# Altium PCB 喂鸟.PcbDoc
Units mm, origin at the board's own origin, x right, y up, seen from the top; angles counter-clockwise.
Board outline 81.37 x 53.34 mm, 2 copper layers (Top Layer, Bottom Layer); 12 components, 27 nets, 125 pads, 4 vias.
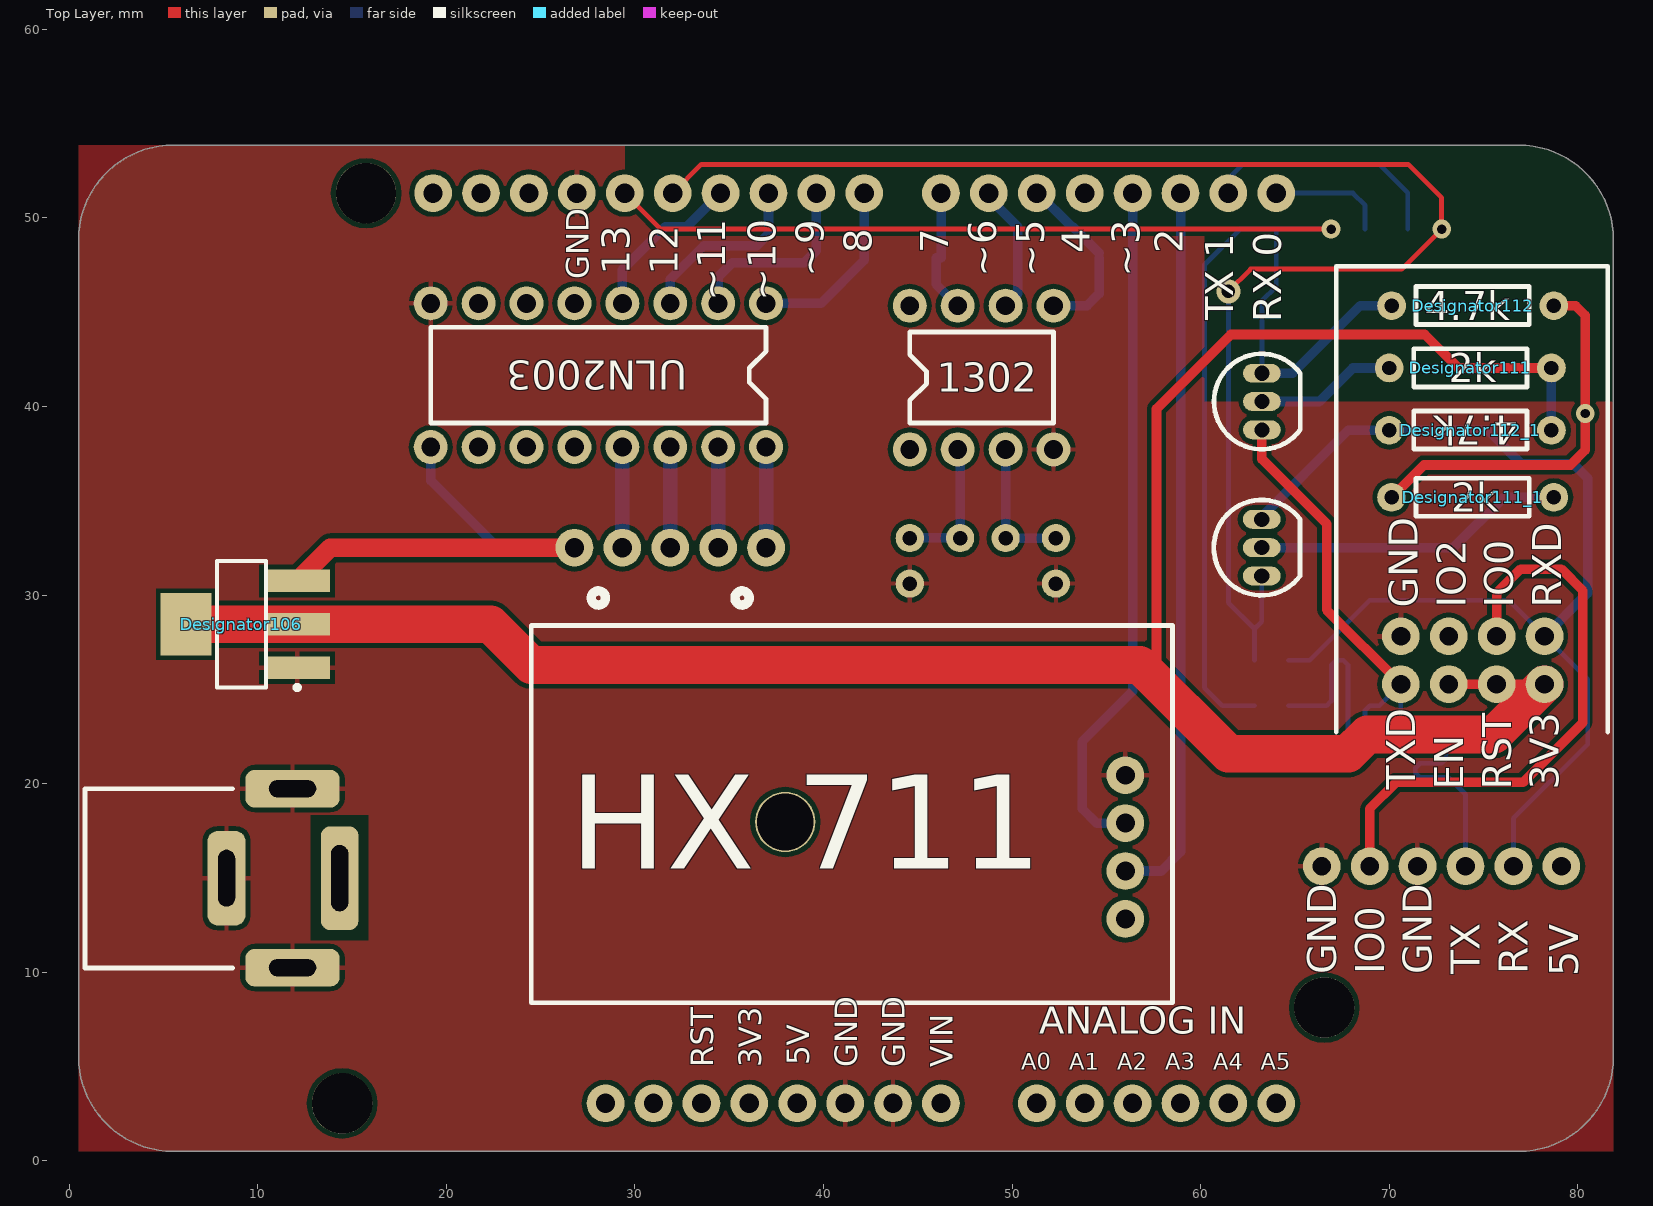
[diagram p0: Top Layer view]
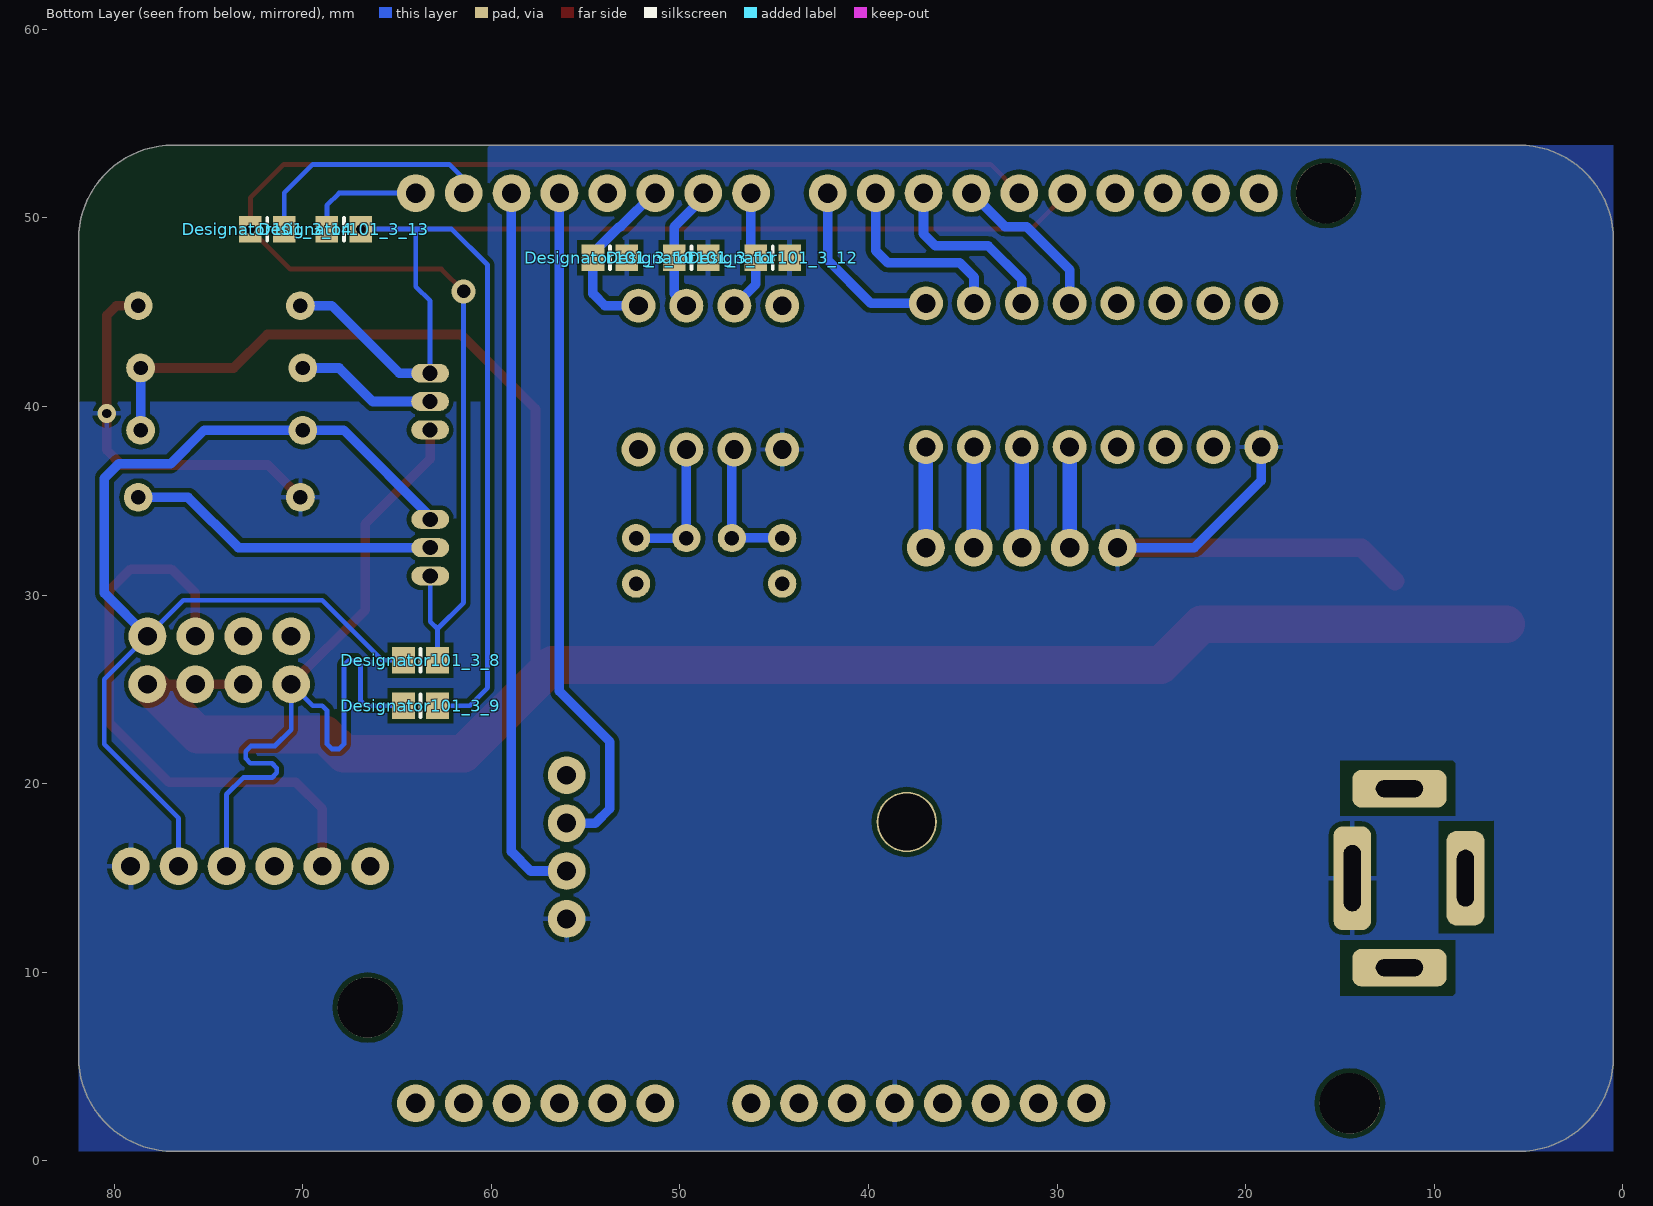
[diagram p1: Bottom Layer view, seen from below]

## Layer stack, top to bottom
Top Solder: solder mask 0.0102, Solder Resist, Dk 3.5
Top Layer: signal copper 0.0356
Dielectric 1: dielectric 0.32, FR-4, Dk 4.8
Bottom Layer: signal copper 0.0356
Bottom Solder: solder mask 0.0102, Solder Resist, Dk 3.5

## Board outline
0.508,5.508 0.508,48.848 cw(c5.508,48.848) 5.508,53.848 76.882,53.848 cw(c76.882,48.848) 81.882,48.848 81.882,5.508 cw(c76.882,5.508) 76.882,0.508 5.508,0.508 cw(c5.508,5.508)

## Design rules (kind name [scope] priority, off if disabled: settings)
Clearance [All] p1: gap=0.254 ignorepadtopadclearanceinfootprint=FALSE except(0: Arc-Hole Track-Hole SMDPad-Hole THPad-Hole Via-Hole Fill-Hole Poly-Hole Region-Hole Text-Hole)
PolygonConnect [All] p1: connectstyle=Relief reliefconductorwidth=0.254 reliefentries=4 polygonreliefangle="90 Angle" airgapwidth=0.254
RoutingVias [All] p1: holewidth=0.711 width=1.27 viastyle="Through Hole" minholewidth=0.711 minwidth=1.27 maxholewidth=0.711 maxwidth=1.27
SolderMaskExpansion [All] p1: expansion=0.102
Width [All] p1: maxlimit=5 minlimit=0.254 preferedwidth=0.508 minimp=50.000000 maximp=50.000000 favimp=50.000000
30 further rules are at their usual default settings.

## Components (designator, comment, footprint, x,y, rotation, side; value= is the part's Value field where it differs from the comment)
Designator101_3_8 "Comment" 6-0805_N 63.754,26.543 r180 bottom
Designator101_3_9 "Comment" 6-0805_N 63.754,24.13 r180 bottom
Designator101_3_10 "Comment" 6-0805_N 53.71,47.879 r0 bottom
Designator101_3_11 "Comment" 6-0805_N 49.392,47.879 r0 bottom
Designator101_3_12 "Comment" 6-0805_N 45.074,47.879 r0 bottom
Designator101_3_13 "Comment" 6-0805_N 67.818,49.403 r0 bottom
Designator101_3_14 "Comment" 6-0805_N 71.882,49.403 r0 bottom
Designator106 "Comment" SOT223_M 9.144,28.448 r180 top
Designator111 "Comment" R 74.295,42.037 r180 top
Designator111_1 "Comment" R 74.422,35.179 r180 top
Designator112 "Comment" R 74.422,45.339 r180 top
Designator112_1 "Comment" R 74.295,38.735 r180 top

## Footprints (in the part's own frame and the unit in brackets; to place one, negate y for a bottom-side part, rotate by r counter-clockwise, add the part's x,y. Pads: shape width x height; smd on the part's side, far side on the other; paste and mask are expansions set on the pad)
6-0805_N [mm] "Chip Resistor, Body 2.0x1.2mm, IPC Medium Density"
  rect 1.2x1.4 smd: 1(-0.9,0) 2(0.9,0)
  silkscreen extent 0,-0.6 0,0.6, body extent -1.07,-0.7 1.07,0.7, height 0.7
R [mil]
  round 60 hole 30: 1(-169.29,0) 2(169.29,0)
  silkscreen extent -118,-40 118,39
SOT223_M [mm] "SOT223, 4-Leads, Body 6.5x3.5mm, Pitch 2.3mm, Lead Span 7mm, IPC Low Density"
  rect 3.5x1.2 smd: 1(-2.95,2.3) 2(-2.95,0) 3(-2.95,-2.3)
  rect 2.7x3.3 smd: 4(2.95,0)
  silkscreen extent -3.08,-3.35 1.3,3.47, body extent -1.85,-3.35 1.85,3.35, height 1.7

## Free pads (board coordinates)
  round 2 hole 1.02: 0(64.008,51.308) 1(36.957,32.512) 1(51.308,3.048) 1(61.468,51.308) 2(34.417,32.512) 2(53.848,3.048) 2(58.928,51.308) 3(31.877,32.512) 3(56.388,3.048) 3(56.388,51.308) 4(29.337,32.512) 4(53.848,51.308) 4(58.928,3.048) 5(26.797,32.512) 5(51.308,51.308) 5(61.468,3.048) 6(48.768,51.308) 7(46.228,51.308) 8(42.164,51.308) 9(39.624,51.308) 10(37.084,51.308) 11(34.544,51.308) 12(32.004,51.308) 13(28.448,3.048) 13(29.464,51.308) 13(30.988,3.048) 13(33.528,3.048) 13(36.068,3.048) 13(38.608,3.048) 13(41.148,3.048) 13(43.688,3.048) 13(46.228,3.048) 13(64.008,3.048) 14(26.924,51.308) 15(24.384,51.308) 16(21.844,51.308) 17(19.304,51.308)
  rrect50% 2x5.5 hole 3.5 slot 0.9 at 0 deg: 1(14.351,14.986)
  round 3.2 hole 3.2 unplated: 1(14.478,3.048) 1(15.748,51.308) 1(66.548,8.128)
  round 1.8 hole 1: 1(36.957,45.466) 1(44.577,37.719) 2(34.417,45.466) 2(47.117,37.719) 3(31.877,45.466) 3(49.657,37.719) 4(29.337,45.466) 4(52.197,37.719) 5(26.797,45.466) 5(52.197,45.339) 6(24.257,45.466) 6(49.657,45.339) 7(21.717,45.466) 7(47.117,45.339) 8(19.177,45.466) 8(44.577,45.339) 9(19.177,37.846) 10(21.717,37.846) 11(24.257,37.846) 12(26.797,37.846) 13(29.337,37.846) 14(31.877,37.846) 15(34.417,37.846) 16(36.957,37.846)
  round 3.2 hole 3 unplated: 1(37.973,17.968)
  round 1.5 hole 0.762: 1(44.577,33.02) 1(47.244,33.02) 1(52.324,30.607) 2(44.577,30.607) 2(49.657,33.02) 2(52.324,33.02)
  round 2 hole 1: 1(56.007,20.447) 1(66.421,15.621) 1(78.232,27.813) 2(56.007,17.907) 2(68.961,15.621) 2(75.692,27.813) 3(56.007,15.367) 3(71.501,15.621) 3(73.152,27.813) 4(56.007,12.827) 4(70.612,27.813) 4(74.041,15.621) 5(70.612,25.273) 5(76.581,15.621) 6(73.152,25.273) 6(79.121,15.621) 7(75.692,25.273) 8(78.232,25.273)
  oval 2x1 hole 0.8: 1(63.238,32.512) 1(63.246,40.259) 2(63.238,34.012) 2(63.246,41.759) 3(63.238,31.012) 3(63.246,38.759)
  rrect50% 5x2 hole 0.9 slot 2.5 at 0 deg: 2(11.851,19.731) 3(11.851,10.241)
  rrect50% 2x5 hole 3 slot 0.9 at 0 deg: 4(8.351,14.986)

## Via types
v1: diameter 1, hole 0.5, Top Layer to Bottom Layer, 2 vias
v2: diameter 1, hole 0.5, Top Layer to Bottom Layer, tented both sides, 1 vias
v3: diameter 1.27, hole 0.711, Top Layer to Bottom Layer, tented both sides, 1 vias

## Nets (pads, with @x,y where several pads share a name; then routed paths per layer and width w, separated by ;. In a path a pad name is that pad's centre, name@x,y a point inside that pad or via, vN(x,y) a via of type N, cw(c..) or ccw(c..) an arc to the next point about the centre after c; other vN are vias at no path point)
3V3: Designator106.2 Designator106.4 Designator111.1 Designator112_1.1 pad.6@73.152,25.273 pad.7@75.692,25.273 pad.8@78.232,25.273 | length 122.3
  Top Layer w0.508: 57.658,25.654 57.658,39.87 61.603,43.815 71.882,43.815 73.66,42.037 Designator111.1 ; pad.6@73.152,25.273 75.692,25.273 pad.8@78.232,25.273
  Top Layer w2: Designator106.4 Designator106.2 22.352,28.448 24.511,26.289 56.769,26.289 61.468,21.59 67.818,21.59 68.834,22.606 75.565,22.606 pad.8@78.232,25.273
  Bottom Layer w0.508: Designator112_1.1@78.595,38.743 Designator111.1
GND: Designator106.1 pad.1@52.324,30.607 pad.1@56.007,20.447 pad.1@66.421,15.621 pad.2@11.851,19.731 pad.2@44.577,30.607 pad.3@11.851,10.241 pad.3@71.501,15.621 pad.4@8.351,14.986 pad.4@52.197,37.719 pad.4@70.612,27.813 pad.8@19.177,45.466 pad.13@41.148,3.048 pad.13@43.688,3.048 pad.14@26.924,51.308
in1: pad.1@36.957,45.466 pad.8@42.164,51.308 | length 9.7
  Bottom Layer w0.508: pad.1@36.957,45.474 39.886,45.474 42.164,47.752 pad.8@42.164,51.308
in2: pad.2@34.417,45.466 pad.9@39.624,51.308 | length 10.2
  Bottom Layer w0.508: pad.2@34.409,45.466 34.409,46.855 35.179,47.625 38.989,47.625 39.624,48.26 pad.9@39.624,51.308
in3: pad.3@31.877,45.466 pad.10@37.084,51.308 | length 9.6
  Bottom Layer w0.508: pad.3@31.869,45.466 31.869,46.728 33.655,48.514 36.449,48.514 37.084,49.149 pad.10@37.084,51.308
in4: pad.4@29.337,45.466 pad.11@34.544,51.308 | length 8.7
  Bottom Layer w0.508: pad.4@29.329,45.466 29.329,47.236 31.623,49.53 32.766,49.53 pad.11@34.544,51.308
IO0: pad.2@68.961,15.621 pad.2@75.692,27.813 | length 31.1
  Top Layer w0.508: pad.2@68.961,15.621 68.961,18.669 70.358,20.066 77.089,20.066 80.264,23.241 80.264,30.226 79.121,31.369 76.962,31.369 75.692,30.099 pad.2@75.692,27.821
out1: pad.1@36.957,32.512 pad.16@36.957,37.846 | length 5.3
  Bottom Layer w0.762: pad.1@36.957,32.52 pad.16@36.957,37.846
out2: pad.2@34.417,32.512 pad.15@34.417,37.846 | length 5.3
  Bottom Layer w0.762: pad.2@34.417,32.512 pad.15@34.417,37.838
out3: pad.3@31.877,32.512 pad.14@31.877,37.846 | length 5.3
  Bottom Layer w0.762: pad.3@31.877,32.512 pad.14@31.877,37.838
out4: pad.4@29.337,32.512 pad.13@29.337,37.846 | length 5.3
  Bottom Layer w0.762: pad.4@29.337,32.512 pad.13@29.337,37.838
pin2: pad.2@58.928,51.308 pad.3@56.007,15.367 | length 38.3
  Bottom Layer w0.508: pad.3@56.007,15.367 57.912,15.367 58.936,16.391 pad.2@58.936,51.308
pin3: pad.2@56.007,17.907 pad.3@56.388,51.308 | length 36.3
  Bottom Layer w0.508: pad.2@56.007,17.907 54.483,17.907 53.721,18.669 53.721,22.225 56.396,24.9 pad.3@56.396,51.308
pin5: Designator101_3_10.2 pad.5@51.308,51.308 pad.5@52.197,45.339 | length 9.3
  Bottom Layer w0.508: pad.5@51.316,51.308 51.316,51.357 53.143,49.53 53.213,49.53 Designator101_3_10.2@54.61,48.133 ; pad.5@52.197,45.339 53.975,45.339 54.618,45.982 Designator101_3_10.2@54.618,47.879
pin6: Designator101_3_11.2 pad.6@48.768,51.308 pad.6@49.657,45.339 | length 6.9
  Bottom Layer w0.508: pad.6@48.776,51.308 48.776,51.046 50.292,49.53 Designator101_3_11.2 ; pad.6@49.657,45.339 50.3,45.982 Designator101_3_11.2@50.3,47.879
pin7: Designator101_3_12.2 pad.7@46.228,51.308 pad.7@47.117,45.339 | length 6.4
  Bottom Layer w0.508: Designator101_3_12.2@45.982,47.879 45.982,46.474 pad.7@47.117,45.339 ; Designator101_3_12.2@46.236,47.879 pad.7@46.236,51.308
rb: Designator111.2 pad.1@63.246,40.259 | length 7.5
  Bottom Layer w0.508: pad.1@63.246,40.259 66.294,40.259 68.072,42.037 Designator111.2
RX: Designator101_3_9.2 Designator101_3_13.1 Designator112.2 pad.2@63.246,41.759 pad.13@29.464,51.308 | length 87.5
  Top Layer w0.254: pad.13@29.464,51.308 31.369,49.403 v1(66.918,49.403)
  Bottom Layer w0.254: Designator101_3_9.2 61.152,24.13 60.198,25.084 60.198,47.498 62.103,49.403 64.008,49.403 ; pad.2@63.246,41.767 63.246,45.593 64.008,46.355 64.008,49.403 ; v1(66.918,49.403) 64.008,49.403
  Bottom Layer w0.508: pad.2@63.254,41.759 64.873,41.759 68.453,45.339 Designator112.2
RX3: Designator101_3_8.1 Designator112_1.2 pad.1@78.232,27.813 pad.2@63.238,34.012 pad.5@76.581,15.621 | length 60.1
  Bottom Layer w0.254: Designator101_3_8.1 65.786,26.543 68.961,29.718 76.327,29.718 78.232,27.813 80.518,25.527 80.518,22.098 76.581,18.161 pad.5@76.581,15.621
  Bottom Layer w0.508: pad.2@63.166,34.083 67.818,38.735 Designator112_1.2 75.231,38.735 77.009,36.957 79.756,36.957 80.518,36.195 80.518,30.099 pad.1@78.232,27.813
RXD: Designator101_3_13.2 pad.0 | length 6.2
  Bottom Layer w0.254: pad.0 68.072,51.308 68.718,50.662 Designator101_3_13.2
tb: Designator111_1.1 pad.1@63.238,32.512 | length 16.6
  Bottom Layer w0.508: pad.1@63.238,32.512 73.406,32.512 76.073,35.179 Designator111_1.1@78.714,35.179
TX: Designator101_3_8.2 Designator101_3_14.2 pad.3@63.238,31.012 pad.12@32.004,51.308 | length 79.6
  Top Layer w0.254: pad.12@32.004,51.308 33.528,52.832 70.993,52.832 72.771,51.054 72.771,49.414 v1(72.782,49.403) 70.658,47.279 62.646,47.279 v3(61.468,46.101)
  Bottom Layer w0.254: v3(61.468,46.101) 61.468,29.591 62.854,28.205 ; Designator101_3_8.2 62.854,28.205 ; pad.3@63.238,31.012 63.238,28.589 62.854,28.205
TX3: Designator101_3_9.1 pad.3@63.246,38.759 pad.4@74.041,15.621 pad.5@70.612,25.273 | length 46.2
  Top Layer w0.508: pad.3@63.246,38.751 63.246,37.211 66.675,33.782 66.675,29.21 pad.5@70.612,25.273
  Bottom Layer w0.254: Designator101_3_9.1 66.675,24.13 66.929,24.384 66.929,26.289 67.183,26.543 67.564,26.543 67.818,26.289 67.818,22.098 68.072,21.844 68.453,21.844 68.707,22.098 68.707,23.876 68.961,24.13 69.469,24.13 70.612,25.273 70.612,22.86 71.469,22.003 72.739,22.003 73.025,21.717 73.025,21.336 72.771,21.082 71.628,21.082 71.374,20.828 71.374,20.574 71.628,20.32 73.152,20.32 74.041,19.431 pad.4@74.041,15.621
TXD: Designator101_3_14.1 pad.1@61.468,51.308 | length 13.1
  Bottom Layer w0.254: pad.1@61.468,51.308 61.468,52.07 62.23,52.832 69.469,52.832 70.982,51.319 Designator101_3_14.1
VCC: Designator101_3_10.1 Designator101_3_11.1 Designator101_3_12.1 Designator106.3 Designator111_1.2 Designator112.1 pad.1@14.351,14.986 pad.1@44.577,37.719 pad.4@56.007,12.827 pad.5@26.797,32.512 pad.6@79.121,15.621 pad.9@19.177,37.846 pad.13@38.608,3.048 | length 46.6
  Top Layer w0.508: Designator111_1.2 71.839,36.896 79.607,36.896 80.391,37.68 80.391,44.831 79.883,45.339 Designator112.1
  Top Layer w1: Designator106.3 13.85,32.504 pad.5@26.797,32.504
  Bottom Layer w0.508: pad.9@19.185,37.846 19.185,36.06 22.733,32.512 pad.5@26.797,32.512
  other v2: 80.391,39.624
X1: pad.1@44.577,33.02 pad.1@47.244,33.02 pad.2@47.117,37.719 | length 7.3
  Bottom Layer w0.508: pad.1@44.577,33.028 pad.1@47.236,33.028 ; pad.1@47.244,33.028 pad.2@47.244,37.719
X2: pad.2@49.657,33.02 pad.2@52.324,33.02 pad.3@49.657,37.719 | length 7.3
  Bottom Layer w0.508: pad.2@49.657,33.02 pad.2@52.316,33.02 ; pad.2@49.657,33.028 pad.3@49.657,37.719

## Polygon pours and split planes (outlines as drawn)
GND on Top Layer "Top Layer-GND" (solid, pour order 0): 0.508,53.848 0.508,0.508 81.882,0.508 81.882,53.848
VCC on Bottom Layer "Bottom Layer-VCC" (solid, pour order 2): 0.508,53.848 0.508,0.508 81.882,0.508 81.882,53.848

## Other copper
Top Layer:
  pour cut-out: 49.892,58.547
  pour cut-out: 60.452,49.657 60.452,51.689 30.612,51.689 30.607,51.694 30.607,49.791 30.981,49.791 31.369,49.403
  pour cut-out: 61.341,54.864 61.341,53.086 61.595,52.832 60.198,51.435 29.464,51.435 29.464,54.613
  pour cut-out: 60.198,53.848 60.198,40.259 81.882,40.259 81.882,53.848
  pour cut-out: 12.827,18.331 15.875,18.331 15.875,11.684 12.827,11.684
Bottom Layer:
  pour cut-out: 60.198,53.848 60.198,40.259 81.882,40.259 81.882,53.848
  pour cut-out: 9.017,8.763 8.89,8.89 8.89,11.684 14.986,11.684 14.986,8.763
  pour cut-out: 9.017,21.209 8.89,21.082 8.89,18.288 14.986,18.288 14.986,21.209
  pour cut-out: 9.779,17.997 9.779,12.077 6.858,12.077 6.858,18.034

## Silkscreen, mask and mechanical layers (free items; w line width, h text height)
Top Overlay:
  circle w0.254: c35.687,29.845 r0.254
  circle w0.254: c28.067,29.845 r0.254
  circle w0.254: c28.067,29.845 r0.5
  circle w0.254: c35.687,29.845 r0.5
  lines w0.254: 0.851,19.731 0.851,10.232 8.664,10.232 ; 0.858,19.731 8.671,19.731 ; 67.183,22.733 67.183,47.433 81.583,47.433 81.583,22.733 ; 19.177,39.116 19.177,44.196 36.957,44.196 36.957,42.926 36.068,42.037 36.068,41.275 36.957,40.386 36.957,39.116 19.177,39.116 ; 24.511,8.382 58.511,8.382 58.511,28.382 24.511,28.382 24.511,8.382 ; 44.577,39.116 44.577,40.322 45.466,41.212 45.466,41.846 44.577,42.735 44.577,43.942 52.197,43.942 52.197,39.116 44.577,39.116 ; 65.27,31.012 cw(c63.23,32.512) 65.27,34.012 65.27,31.012 ; 65.278,38.759 cw(c63.238,40.259) 65.278,41.759 65.278,38.759
  text "8" at 43.053,48.133 h2.54 r90
  text "7" at 47.117,48.133 h2.54 r90
  text "4" at 54.61,48.133 h2.54 r90
  text "2" at 59.563,48.133 h2.54 r90
  text "13" at 30.226,46.99 h2.54 r90
  text "12" at 32.766,46.99 h2.54 r90
  text "~9" at 40.513,46.863 h2.54 r90
  text "~6" at 49.657,46.863 h2.54 r90
  text "~5" at 52.197,46.863 h2.54 r90
  text "~3" at 57.277,46.863 h2.54 r90
  text "GND" at 27.559,46.736 h1.21 r90
  text "~11" at 35.306,45.593 h2.54 r90
  text "~10" at 37.973,45.593 h2.54 r90
  text "TX 1" at 62.23,44.577 h2.54 r90
  text "4.7k" at 71.882,44.577 h1.52
  text "RX 0" at 64.77,44.45 h2.54 r90
  text "ULN2003" at 32.766,42.418 h1.52 r180
  text "2k" at 73.152,41.275 h1.52
  text "1302" at 46.019,40.767 h1.52
  text "4.7k" at 76.835,39.497 h1.52 r180
  text "2k" at 73.279,34.417 h1.52
  text "GND" at 71.501,29.337 h1.52 r90
  text "IO2" at 74.041,29.337 h1.52 r90
  text "IO0" at 76.581,29.337 h1.52 r90
  text "RXD" at 79.121,29.337 h1.52 r90
  text "TXD" at 71.374,19.685 h1.52 r90
  text "EN" at 73.914,19.685 h1.52 r90
  text "RST" at 76.454,19.685 h1.52 r90
  text "3V3" at 78.994,19.685 h1.52 r90
  text "HX 711" at 26.543,15.494 h5
  text "GND" at 67.183,9.906 h1.52 r90
  text "IO0" at 69.723,9.906 h1.52 r90
  text "GND" at 72.263,9.906 h1.52 r90
  text "TX" at 74.803,9.906 h1.52 r90
  text "RX" at 77.343,9.906 h1.52 r90
  text "5V" at 80.01,9.779 h1.52 r90
  text "ANALOG IN" at 51.435,6.731 h1.42
  text "5V" at 39.243,5.08 h1.21 r90
  text "RST" at 34.163,4.953 h1.21 r90
  text "3V3" at 36.703,4.953 h1.21 r90
  text "GND" at 41.783,4.953 h1.21 r90
  text "GND" at 44.323,4.953 h1.21 r90
  text "VIN" at 46.863,4.953 h1.21 r90
  text "A0" at 50.497,4.838 h0.86
  text "A1" at 53.037,4.838 h0.86
  text "A2" at 55.577,4.838 h0.86
  text "A3" at 58.117,4.838 h0.86
  text "A4" at 60.657,4.838 h0.86
  text "A5" at 63.197,4.838 h0.86
Mechanical 1:
  the board outline again, w0.254